# EAGLE board vin-5v-regulator (EAGLE 9.6.2)
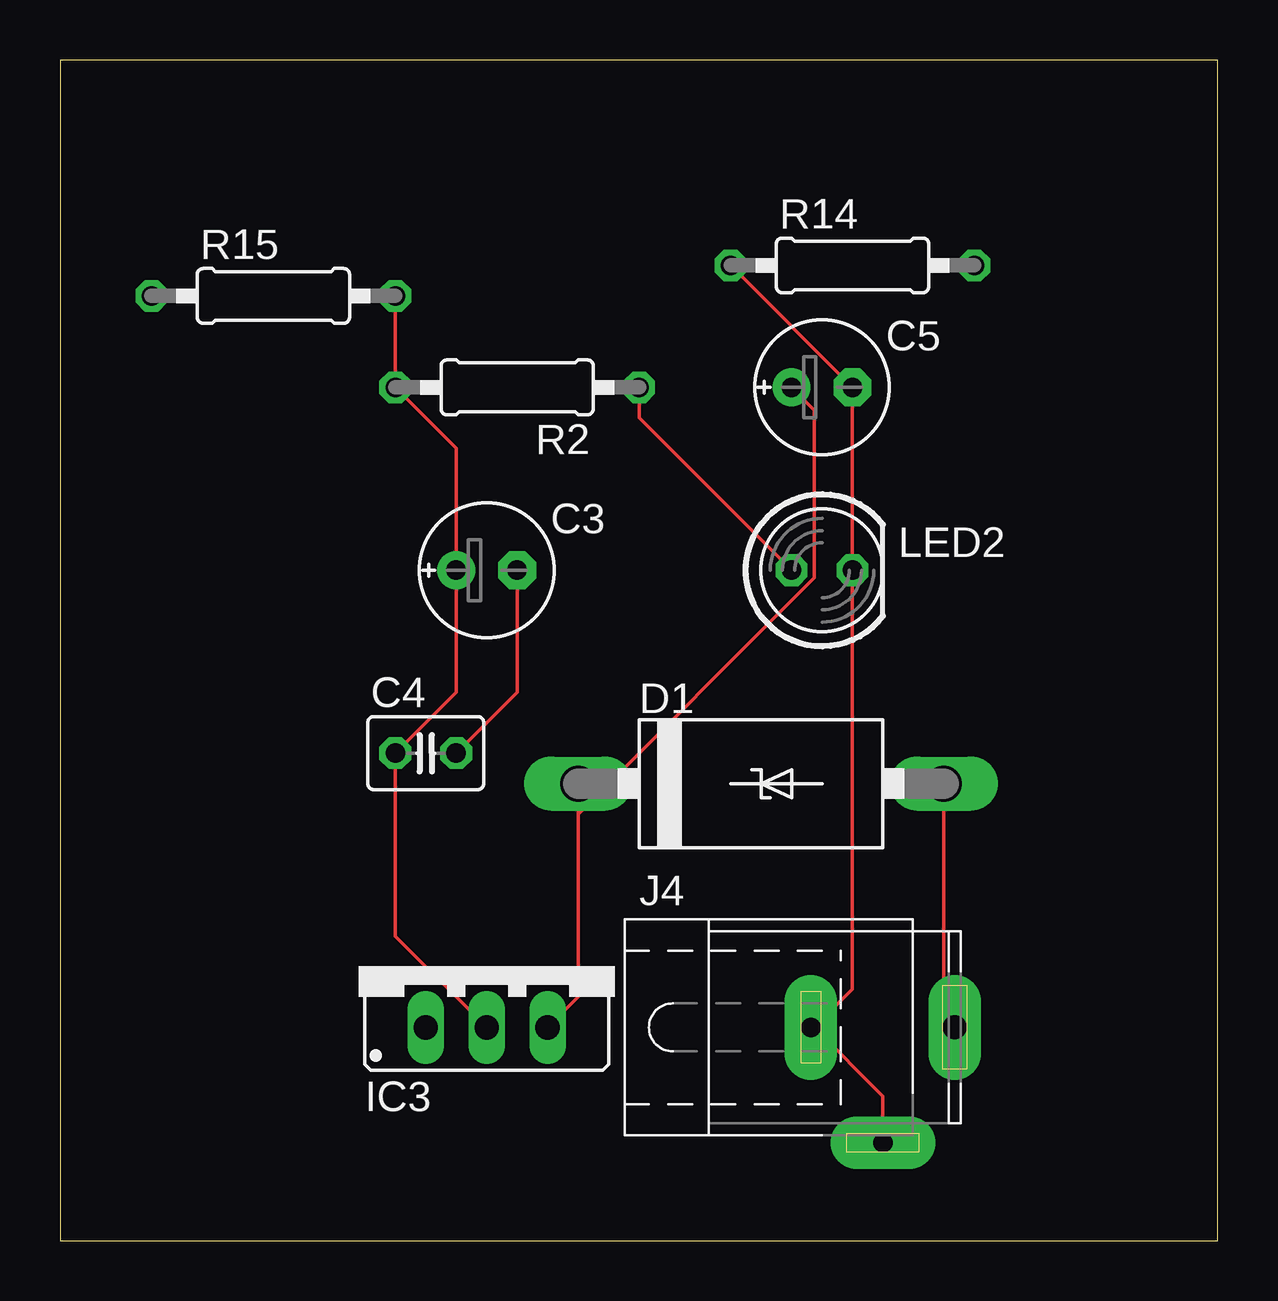
[diagram p0: board, top side]
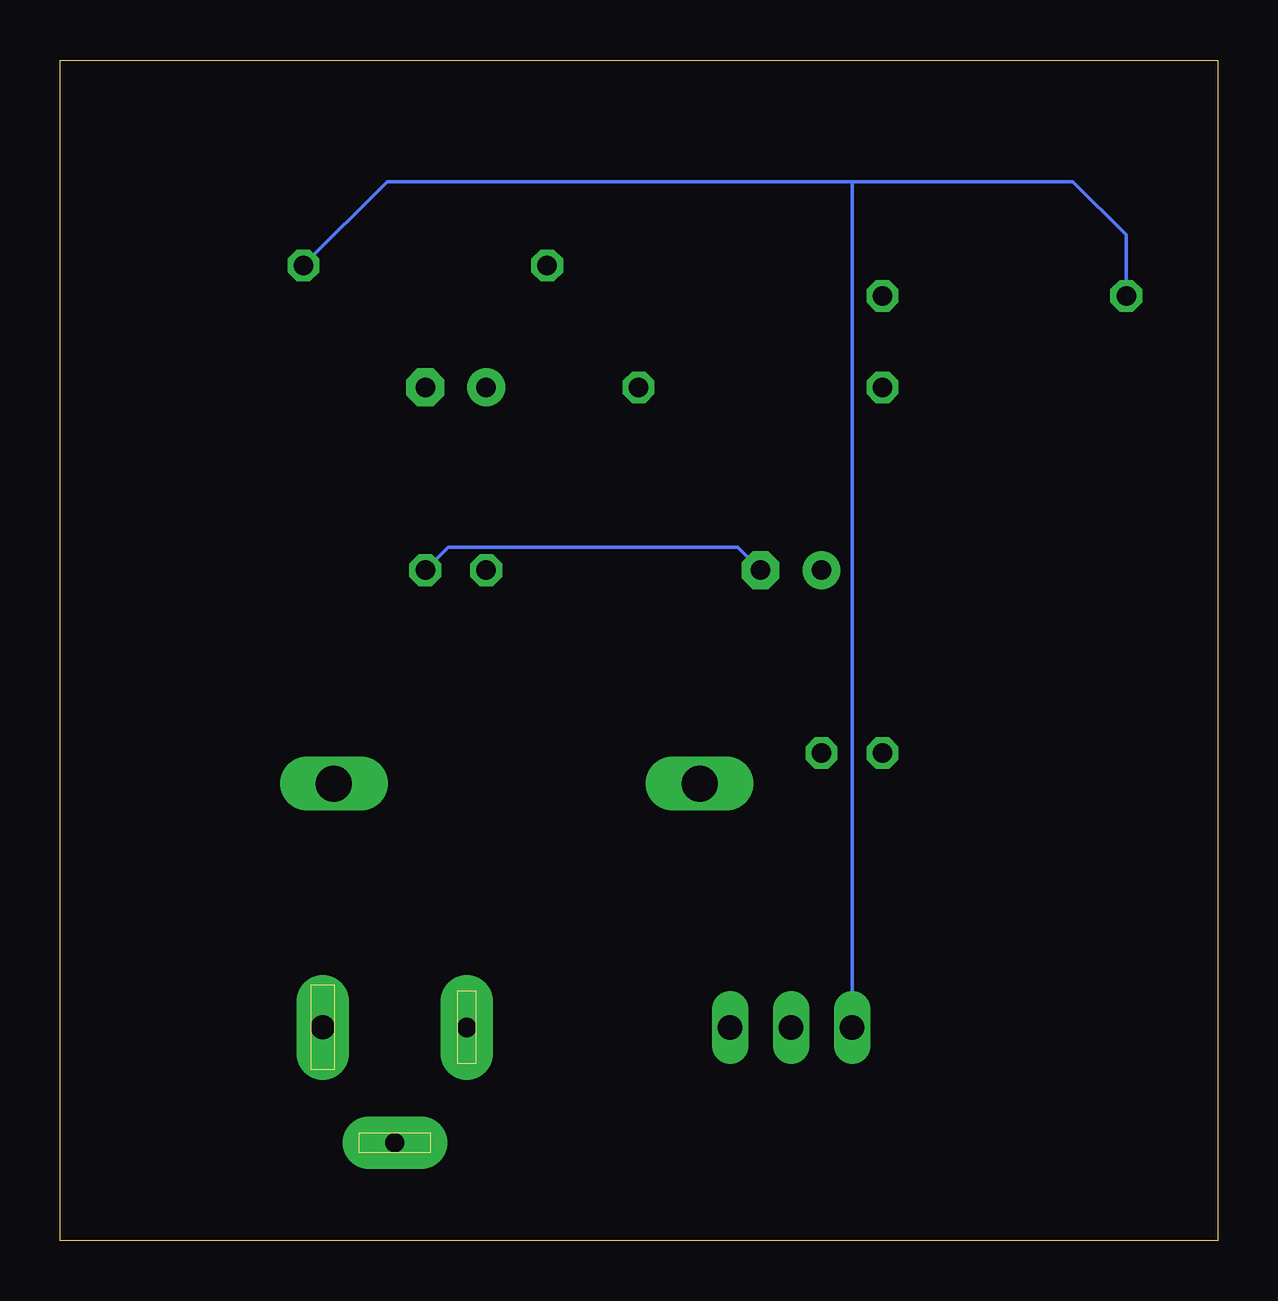
[diagram p1: board, bottom side, seen from below]

Size 48.24 x 49.2 mm. Coordinates in mm from the lower left corner, seen from the top.
Outline: 0,0 48.24,0 48.24,49.2 0,49.2 0,0
Copper layers (1*16): Top 0.035mm / dielectric 1.5mm / Bottom 0.035mm
Design rules "default": minimum track width 6mil, minimum drill 0.35mm, track to track 6mil, track to pad 6mil, pad to pad 6mil, via to via 6mil, smd to smd 6mil, copper to edge 40mil, drill to drill 6mil, minimum pad ring 10mil, minimum via ring 8mil, stop-mask expansion 4mil, vias tented up to drill 0mil, thermal gap 10mil

## Footprints (pad centres in the part's own frame; a part is rotated, then mirrored left to right if it is on the bottom)
E2,5-6E = drill 0.813 pad 1.575: + -1.27,0 | drill 0.813 pad 1.575 octagon: - 1.27,0
C025-030X050 = drill 0.813 octagon: 1 -1.27,0; 2 1.27,0
C4111-15 = drill 1.499 long: A 7.62,0; C -7.62,0
317TS = drill 1.016 long: 1 -2.54,-2.54; 2 0,-2.54; 3 2.54,-2.54
SPC4077 = drill 0.8 pad 2.184 long: 1 -3,0; 2 0,-4.8 | drill 1 pad 2.184 long: 3 3,0
LED5MM = drill 0.813 octagon: A -1.27,0; K 1.27,0
0207/10 = drill 0.813 octagon: 1 -5.08,0; 2 5.08,0

## Placement (x,y rotation side)
C3  10uF  [E2,5-6E]  17.78,27.94 0 top
C4  100nF  [C025-030X050]  15.24,20.32 0 top
C5  47uF  [E2,5-6E]  31.75,35.56 0 top
D1  1N5908  [C4111-15]  29.21,19.05 0 top
IC3  LM317  [317TS]  17.78,11.43 0 top
J4  [SPC4077]  34.29,8.89 0 top
LED2  VERDE  [LED5MM]  31.75,27.94 0 top
R2  1K  [0207/10]  19.05,35.56 180 top
R14  715  [0207/10]  33.02,40.64 0 top
R15  240  [0207/10]  8.89,39.37 0 top

## Library data of the parts
C3-C5 = rcl; SPICEPREFIX: C
D1 = diode
IC3 = v-reg
J4 = con-jack; OC_FARNELL: unknown; OC_NEWARK: unknown
LED2 = led
R2 R14 R15 = rcl; SPICEPREFIX: R

## Nets
+5V: C3.+ C4.1 IC3.2 R2.2 R15.2
GND: C3.- C4.2 C5.- J4.1 J4.2 LED2.K R14.1
N$1: D1.A J4.3
N$2: C5.+ D1.C IC3.3
N$3: IC3.1 R14.2 R15.1
N$4: LED2.A R2.1

## Tracks (layer width: path | path; a pad name or v marks a point on that pad's centre or on a via)
+5V
  Top 0.152: R15.2 R2.2 16.51,33.02 C3.+ 16.51,22.86 C4.1 13.97,12.7 IC3.2
GND
  Top 0.152: 31.43,8.89 34.29,6.03 J4.2 | C4.2 19.05,22.86 C3.- | R14.1 C5.- LED2.K 33.02,10.48 31.43,8.89 | 31.43,8.89 J4.1
  Bottom 0.152: C3.- 20,28.89 32.07,28.89 LED2.K
N$1
  Top 0.152: D1.A 36.83,9.21 37.15,8.89 J4.3
N$2
  Top 0.152: IC3.3 21.59,10.16 21.59,17.78 | D1.C 21.59,17.78 | C5.+ 31.43,34.61 31.43,27.62 21.59,17.78
N$3
  Bottom 0.152: R15.1 3.81,41.91 6.03,44.13 15.24,44.13 | 15.24,44.13 34.61,44.13 R14.2 | 15.24,44.13 IC3.1
N$4
  Top 0.152: LED2.A 24.13,34.29 R2.1